# Altium PCB TPS5430-T.PcbDoc
Units mil, origin at the board's own origin, x right, y up, seen from the top; angles counter-clockwise.
Board outline 3105 x 2810 mil, 2 copper layers (Top Layer, Bottom Layer); 70 components, 24 nets, 173 pads, 80 vias.
Unrouted connection lines stored in the file: 44.
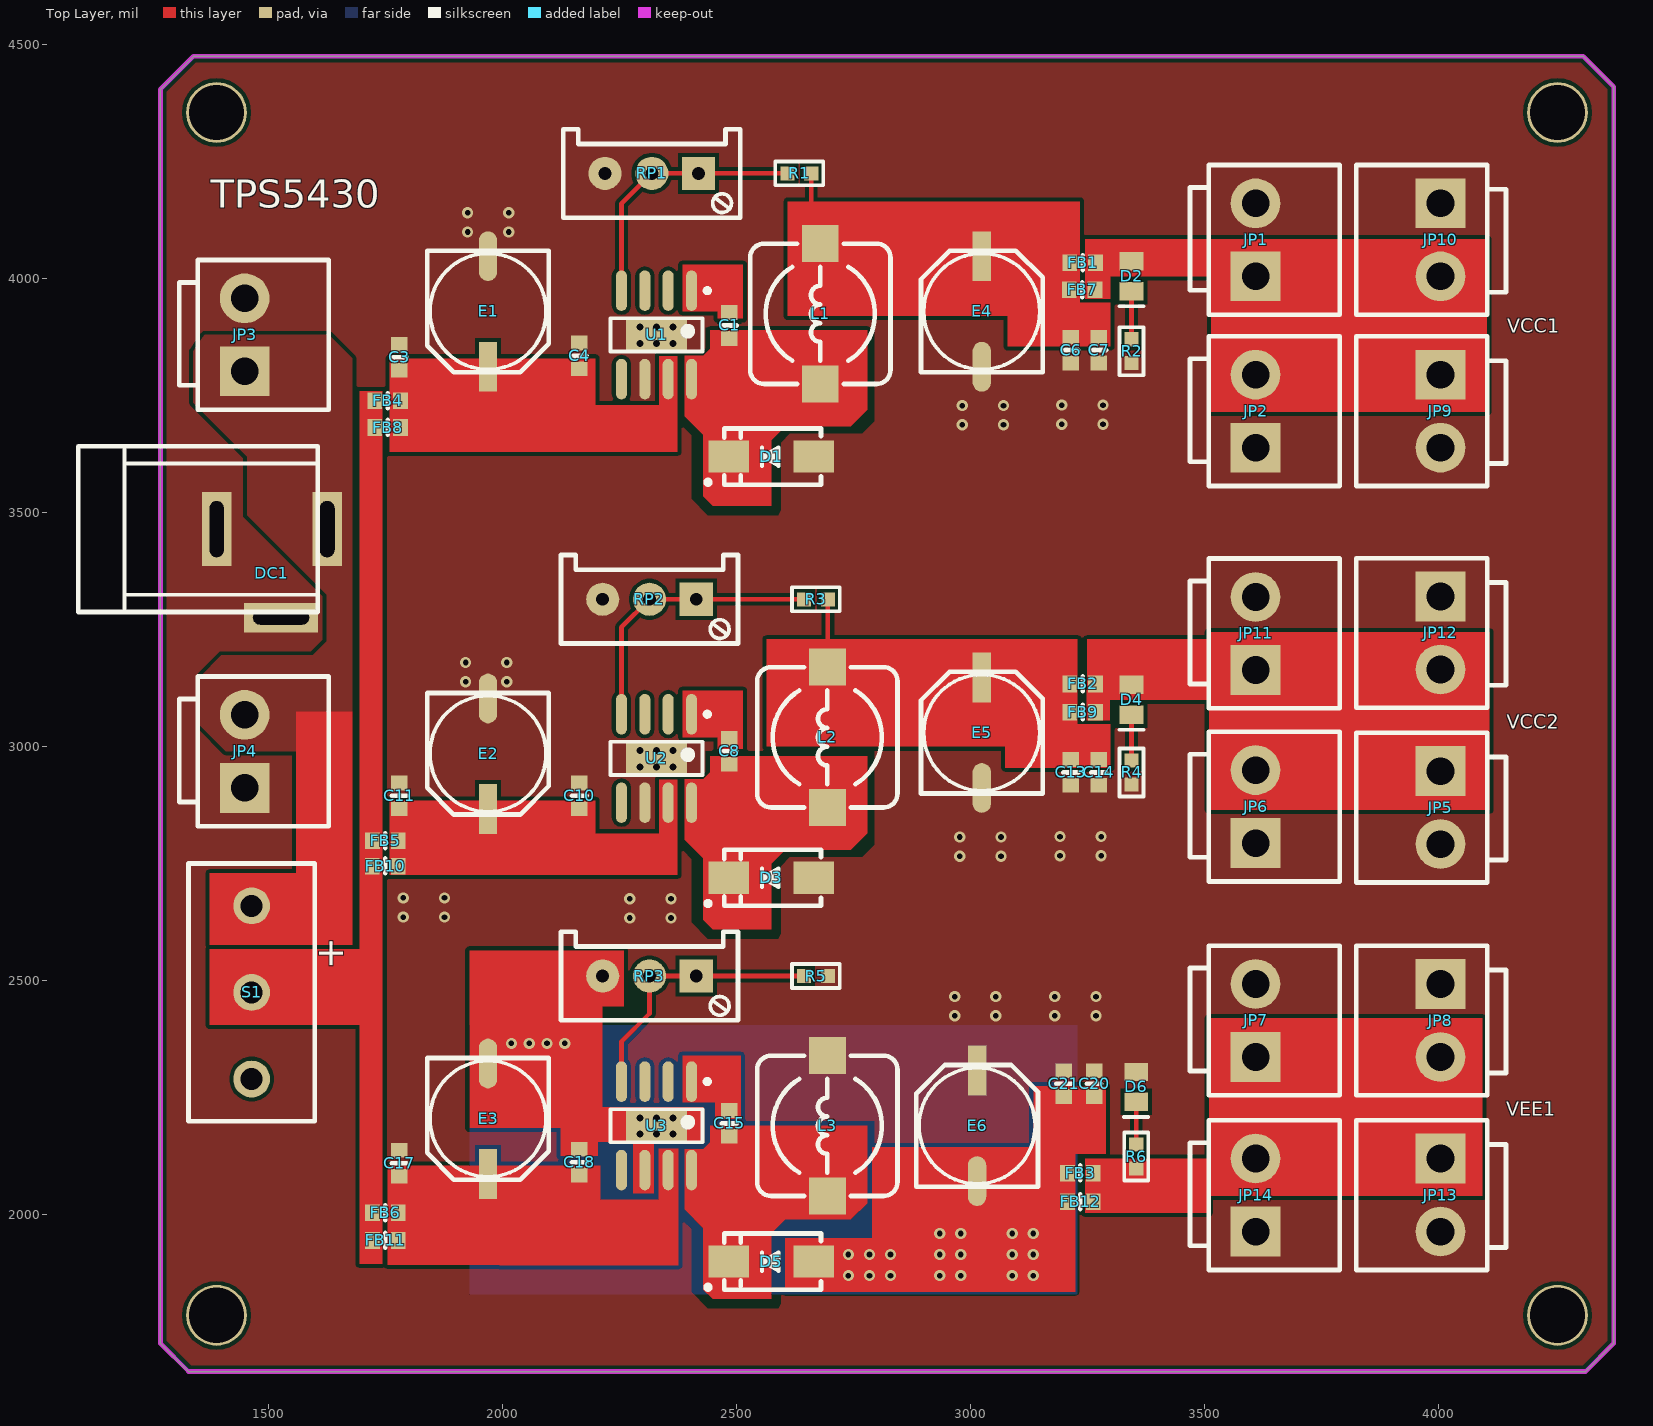
[diagram p0: Top Layer view]
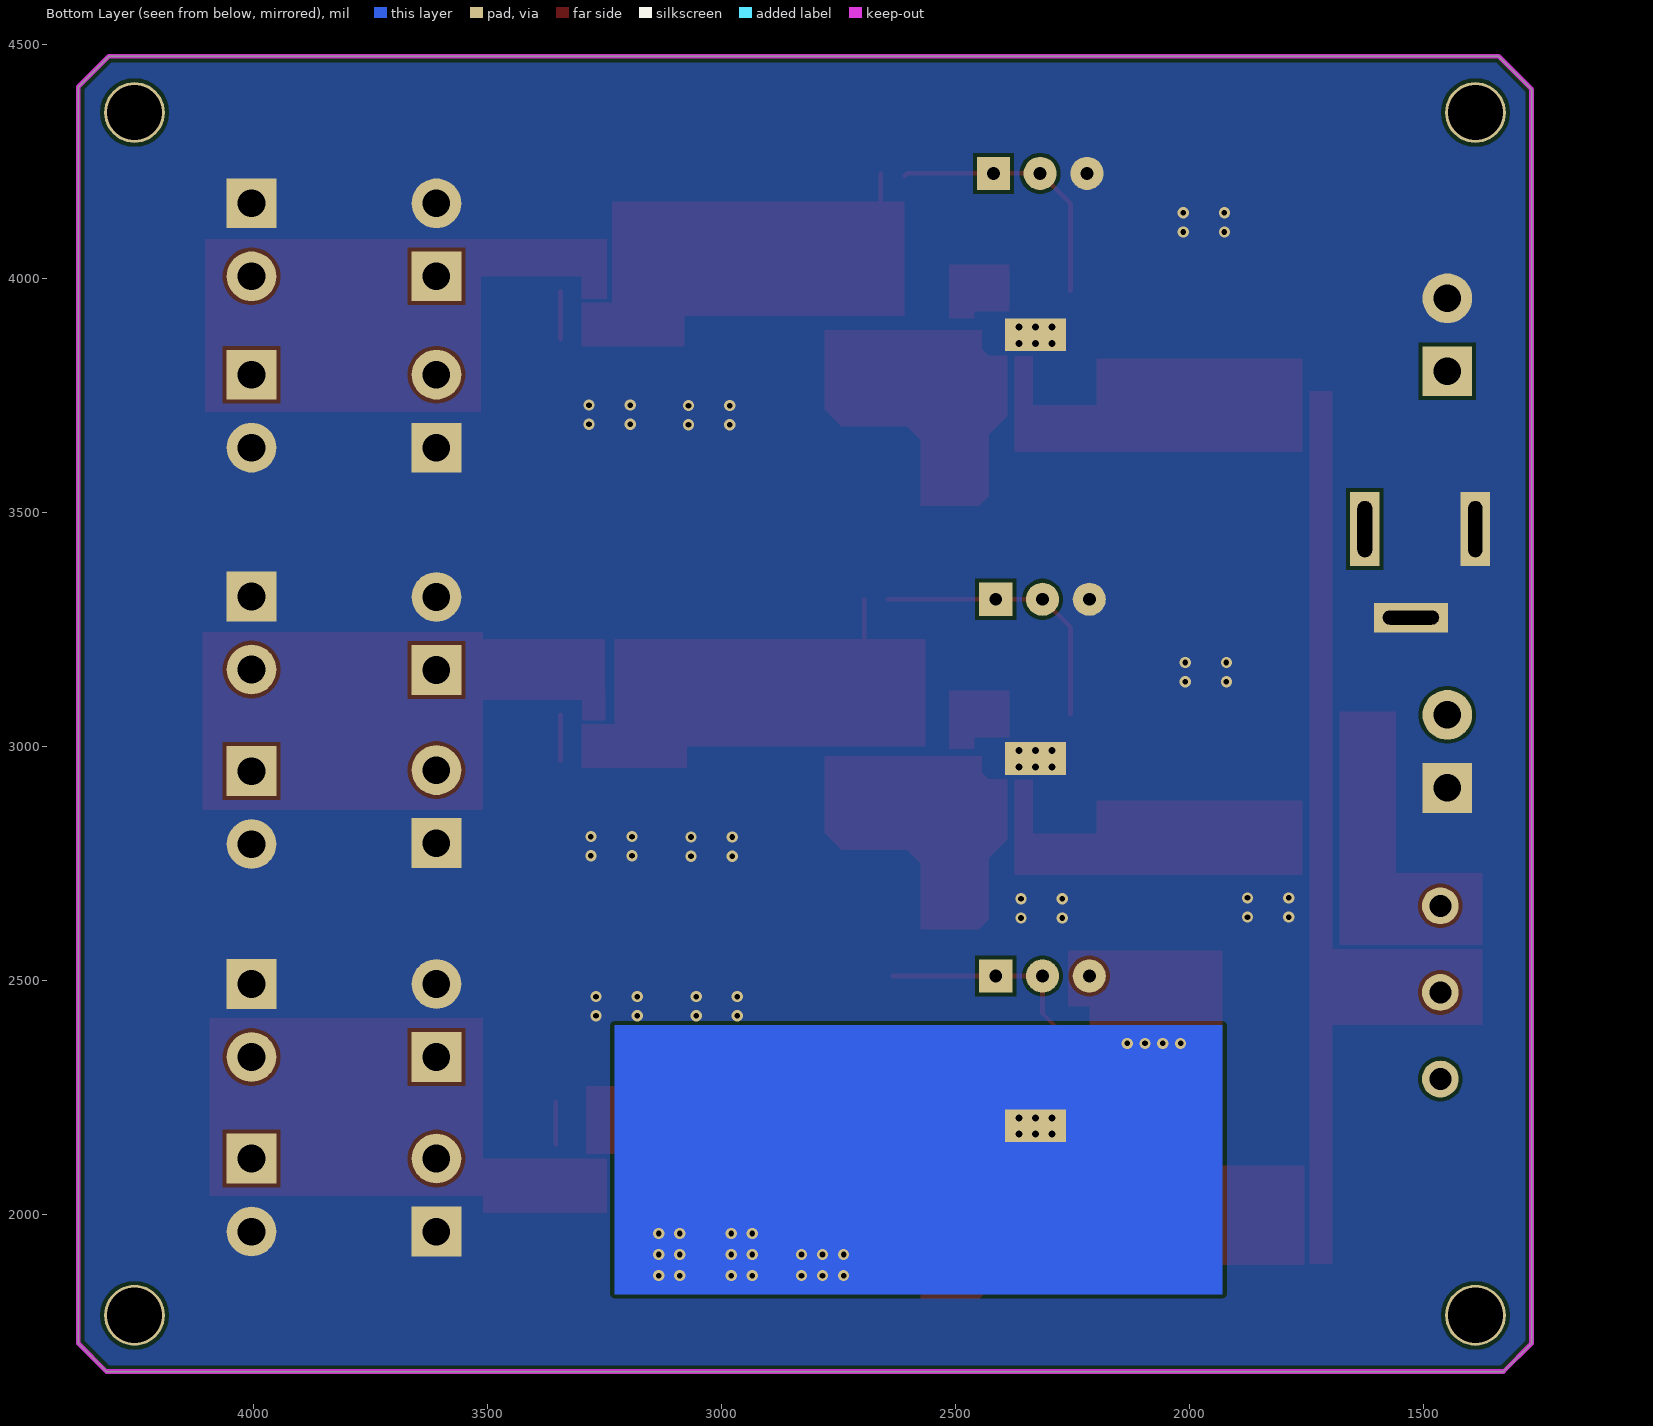
[diagram p1: Bottom Layer view, seen from below]
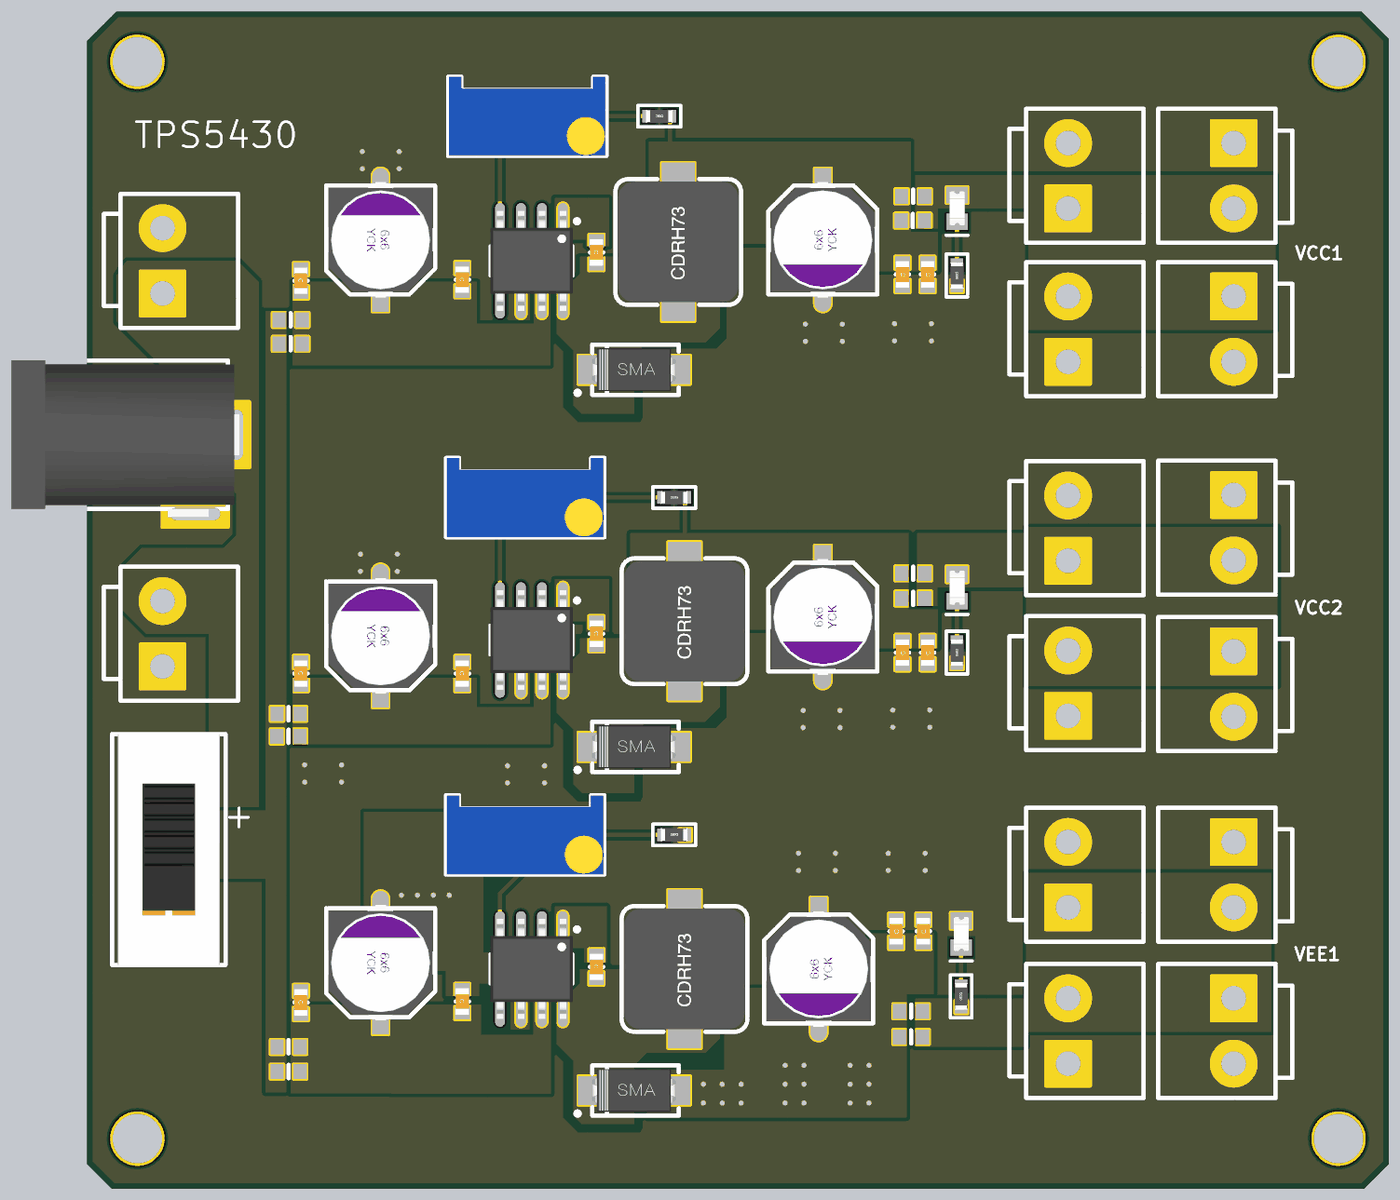
[diagram p2: 3D render of the assembled board from above, using the file's embedded part models]

## Layer stack, top to bottom
Top Solder: solder mask 0.4, Solder Resist, Dk 3.5
Top Layer: signal copper 1.4
Dielectric 1: dielectric 12.6, FR-4, Dk 4.8
Bottom Layer: signal copper 1.4
Bottom Solder: solder mask 0.4, Solder Resist, Dk 3.5

## Board outline
1330,1665 1270,1725 1270,4405 1340,4475 4310,4475 4375,4410 4375,1725 4315,1665

## Design rules (kind name [scope] priority, off if disabled: settings)
Clearance [All] p1: gap=8 ignorepadtopadclearanceinfootprint=FALSE except(0: Arc-Hole Track-Hole SMDPad-Hole THPad-Hole Via-Hole Fill-Hole Poly-Hole Region-Hole Text-Hole)
PolygonConnect [All] p1: connectstyle=Direct reliefconductorwidth=10 reliefentries=4 polygonreliefangle="90 Angle" airgapwidth=10
RoutingVias [All] p1: holewidth=12 width=24 viastyle="Through Hole" minholewidth=12 minwidth=24 maxholewidth=12 maxwidth=24
SolderMaskExpansion [All] p1: expansion=4 istentingtop=FALSE
Width [All] p1: maxlimit=45 minlimit=10 preferedwidth=10
30 further rules are at their usual default settings.

## Components (designator, comment, footprint, x,y, rotation, side; value= is the part's Value field where it differs from the comment)
C1 "Cap-S" C0603-L 2485,3900 r270 top value=100nF
C3 "Cap-S" C0603-L 1780,3832.44 r270 top value=100nF
C4 "Cap-S" C0603-L 2165,3835 r270 top value=10uF
C6 "Cap-S" C0603-L 3215,3847.56 r90 top value=100nF
C7 "Cap-S" C0603-L 3275,3847.56 r90 top value=10uF
C8 "Cap-S" C0603-L 2485,2990 r270 top value=100nF
C10 "Cap-S" C0603-L 2165,2895 r270 top value=100nF
C11 "Cap-S" C0603-L 1780,2895 r270 top value=10uF
C13 "Cap-S" C0603-L 3215,2945 r90 top value=100nF
C14 "Cap-S" C0603-L 3275,2945 r90 top value=10uF
C15 "Cap-S" C0603-L 2485,2195 r270 top value=100nF
C17 "Cap-S" C0603-L 1780,2110 r270 top value=100nF
C18 "Cap-S" C0603-L 2165,2112.44 r270 top value=10uF
C20 "Cap-S" C0603-L 3265,2280 r90 top value=100nF
C21 "Cap-S" C0603-L 3200,2280 r90 top value=10uF
D1 "SS36" SMA 2575,3620 r180 top
D2 "LED" Led-0805_L 3345,4005 r270 top
D3 "SS36" SMA 2575,2720 r180 top
D4 "LED" Led-0805_L 3345,3100 r270 top
D5 "SS36" SMA 2575,1900 r180 top
D6 "LED" Led-0805_L 3355,2273 r270 top
DC1 "DC" DCIN-L 1626.22,3465 r180 top
E1 "10uF/10V" "CT 6*6 - V" 1970,3930 r270 top
E2 "10uF/10V" "CT 6*6 - V" 1970,2985 r270 top
E3 "10uF/10V" "CT 6*6 - V" 1970,2205 r270 top
E4 "10uF/10V" "CT 6*6 - V" 3025,3930 r90 top
E5 "10uF/10V" "CT 6*6 - V" 3025,3030 r90 top
E6 "10uF/10V" "CT 6*6 - V" 3015,2190 r90 top
FB1 "600R" FB-0603 3240,4035 r0 top
FB2 "600R" FB-0603 3240,3135 r0 top
FB3 "600R" FB-0603 3235,2090 r0 top
FB4 "600R" FB-0603 1755,3740 r0 top
FB5 "600R" FB-0603 1750,2800 r0 top
FB6 "600R" FB-0603 1750,2005 r0 top
FB7 "600R" FB-0603 3239,3977 r0 top
FB8 "600R" FB-0603 1755,3683 r0 top
FB9 "600R" FB-0603 3240,3075 r0 top
FB10 "600R" FB-0603 1749.88,2746 r0 top
FB11 "600R" FB-0603 1750,1946 r0 top
FB12 "600R" FB-0603 3235,2028.57 r0 top
JP1 "HDR-1X2" VH3.96-LI-2P 3610,4082.95 r90 top
JP2 "HDR-1X2" VH3.96-LI-2P 3610,3716.95 r90 top
JP3 "HDR-1X2" VH3.96-LI-2P 1450,3880 r90 top
JP4 "HDR-1X2" VH3.96-LI-2P 1450,2990 r90 top
JP5 "HDR-1X2" VH3.96-LI-2P 4005,2870 r270 top
JP6 "HDR-1X2" VH3.96-LI-2P 3610,2871.95 r90 top
JP7 "HDR-1X2" VH3.96-LI-2P 3610,2415 r90 top
JP8 "HDR-1X2" VH3.96-LI-2P 4005,2415 r270 top
JP9 "HDR-1X2" VH3.96-LI-2P 4005,3717.05 r270 top
JP10 "HDR-1X2" VH3.96-LI-2P 4005,4083.05 r270 top
JP11 "HDR-1X2" VH3.96-LI-2P 3610,3241.95 r90 top
JP12 "HDR-1X2" VH3.96-LI-2P 4005,3243.05 r270 top
JP13 "HDR-1X2" VH3.96-LI-2P 4005,2042.05 r270 top
JP14 "HDR-1X2" VH3.96-LI-2P 3610,2041.95 r90 top
L1 "22uH" CDRH73 2680,3925 r90 top
L2 "22uH" CDRH73 2695,3020 r90 top
L3 "22uH" CDRH73 2695,2190 r90 top
R1 "10K" "R 0603_L" 2635,4225 r0 top
R2 "10K" "R 0603_L" 3345,3845 r90 top
R3 "10K" "R 0603_L" 2670.59,3315 r0 top
R4 "10K" "R 0603_L" 3345,2945 r90 top
R5 "10K" "R 0603_L" 2670.59,2510 r0 top
R6 "10K" "R 0603_L" 3355,2124.41 r90 top
RP1 "10K" 3296W 2320,4225 r180 top
RP2 "10K" 3296W 2315,3315 r180 top
RP3 "10K" 3296W 2315,2510 r180 top
S1 "SS-12F23" SS-12D10 1465,2475 r270 top
U1 "TPS5430" "SOP-8 with pad" 2330,3880 r270 top
U2 "TPS5430" "SOP-8 with pad" 2330,2975 r270 top
U3 "TPS5430" "SOP-8 with pad" 2330,2190 r270 top

## Footprints (in the part's own frame and the unit in brackets; to place one, negate y for a bottom-side part, rotate by r counter-clockwise, add the part's x,y. Pads: shape width x height; smd on the part's side, far side on the other; paste and mask are expansions set on the pad)
3296W [mm] "Precise Multi-Winding Adjustable Resistor"
  rect 1.8x1.8 hole 0.7: 1(-2.54,0)
  round 1.8 hole 0.7: 2(0,0) 3(2.54,0)
  silkscreen extent -4.8,-2.4 4.8,2.4, body extent -4.75,-2.4 4.75,2.4, height 11.52
C0603-L [mm] "贴片电容0603 高密度"
  rect 0.8x0.9 smd: 1(-0.7,0) 2(0.7,0)
  silkscreen extent 0,-0.39 0,0.41, body extent -0.8,-0.4 0.8,0.41, height 0.88
CDRH73 [mm] "7.3*7.3*3.4mm（长宽高）"
  rect 2x2 smd: 1(-3.81,0) 2(3.81,0)
  silkscreen extent -3.81,-3.81 3.81,3.81, body extent -3.65,-3.65 3.65,3.65, height 3.65
"CT 6*6 - V" [mm] "直径6mm，高6mm"
  rect 2.7x1 smd: 1(3,0)
  oval 2.7x1 smd: 2(-3,0)
  silkscreen extent -3.3,-3.3 3.3,3.3, body extent -3.5,-3.15 3.5,3.15, height 6
DCIN-L [mm] "DC插座  小焊盘"
  rect 1.6x4 hole 0.8 slot 3.048 at 90 deg: 1(0,0)
  rect 1.6x4 hole 0.762 slot 3.048 at 90 deg: 2(6,0)
  rect 4x1.6 hole 0.762 slot 3.048 at 0 deg: 3(2.5,4.8)
  silkscreen extent 0.52,-4.5 13.5,4.5, body extent -0.2,-4.5 13.62,5, height 11.2
FB-0603 [mm]
  rect 0.8x0.9 smd: 1(-0.686,-0.025) 2(0.714,-0.025)
  silkscreen extent 0.01,-0.42 0.01,0.38, body extent -0.8,-0.44 0.83,0.39, height 0.71
Led-0805_L [mm] "贴片LED0805-高密度"
  rect 1x1.3 smd: 1(-0.813,0) 2(0.813,0)
  silkscreen extent 1.63,-0.66 1.63,0.66, body extent -1.03,-0.44 1.03,0.47, height 0.85
"R 0603_L" [mil] "1/10W贴片电阻"
  rect 30x30 smd: 1(-25.59,0) 2(25.59,0)
  silkscreen extent -51,-26 51,26, body extent -31,-16 32,16, height 16
SMA [mm] "4.5x2.6*2.2mm（长宽高，不包括引脚）"
  rect 2.2x1.75 smd: 1(-2.3,0) 2(2.3,0)
  silkscreen extent -2.7,-1.52 3.56,1.52, body extent -2.53,-1.3 2.58,1.3, height 2.15
"SOP-8 with pad" [mm]
  oval 2.2x0.6 smd: 1(-2.4,1.905) 2(-2.4,0.635) 3(-2.4,-0.635) 4(-2.4,-1.905) 5(2.4,-1.905) 6(2.4,-0.635) 7(2.4,0.635) 8(2.4,1.905)
  rect 1.778x3.3 smd: 9(0,0)
  rect 1.778x3.3 smd far side: 9(0,0)
  silkscreen extent -2.52,-2.5 0.9,2.88, body extent -3.03,-2.5 3.03,2.5, height 1.9
SS-12D10 [mm] "脚距3mm"
  round 2 hole 1.2: 1(-4.7,0) 2(0,0) 3(4.7,0)
  silkscreen extent -7,-3.43 7,3.43, body extent -7,-3.1 7,3.1, height 9.65
VH3.96-LI-2P [mm] "接插件，25V/5A"
  rect 2.7x2.7 hole 1.5: 1(-1.98,0)
  round 2.7 hole 1.5: 2(1.982,0)
  silkscreen extent -4.06,-4.57 4.07,3.56, body extent -3.98,-4.4 4.03,4.16, height 10.5

## Part data
C1 C3 C4 C6 C7 C8 C10 C11 C13 C14 C15 C17 C18 C20 C21: "贴片瓷片电容"
D1 D3 D5: library part M7, "整流二极管", BOM名称=整流二极管, 学习资源=www.ooocke.com, 版权归属=源创客
D2 D4 D6: "发光二极管"
DC1: "DC插座"
E1 E2 E3 E4 E5 E6: library part C-CT, "贴片固态电容", BOM名称=贴片固态电容, 学习资源=www.ooocke.com, 版权归属=源创客
FB1 FB2 FB3 FB4 FB5 FB6 FB7 FB8 FB9 FB10 FB11 FB12: library part FB
JP1 JP2 JP3 JP4 JP5 JP6 JP7 JP8 JP9 JP10 JP11 JP12 JP13 JP14: library part "Header 2_1", "2P接插件", BOM名称=2P接插件, 学习资源=www.ooocke.com, 版权归属=源创客
L1 L2 L3: library part L-CDRH, "功率屏蔽电感", BOM名称=功率屏蔽电感, 学习资源=www.ooocke.com, 版权归属=源创客
R1 R2 R3 R4 R5 R6: library part R, "贴片电阻", BOM名称=贴片电阻, 学习资源=www.ooocke.com, 版权归属=源创客
RP1 RP2 RP3: library part RP-ID, "插件单联电位器", BOM名称=插件电位器, 学习资源=www.ooocke.com, 版权归属=源创客
S1: library part SSW-1P, "1路波动开关", BOM名称=波动开关, 学习资源=www.ooocke.com, 版权归属=源创客

## Free pads (board coordinates)
  round 129.92 hole 118.11: 3(1390,1785) 3(1390,4355) 3(4255,4355) 3(4255,1785)

## Via types
v1: diameter 24, hole 12, Top Layer to Bottom Layer, tented both sides, 62 vias
v2: diameter 25, hole 15, Top Layer to Bottom Layer, 18 vias

## Nets (pads, with @x,y where several pads share a name; then routed paths per layer and width w, separated by ;. In a path a pad name is that pad's centre, name@x,y a point inside that pad or via, vN(x,y) a via of type N, cw(c..) or ccw(c..) an arc to the next point about the centre after c; other vN are vias at no path point)
GND: C3.1 C4.1 C6.1 C7.1 C10.1 C11.1 C13.1 C14.1 C17.1 C20.2 C21.2 D1.1 D3.1 D6.1 DC1.2 DC1.3 E1.2 E2.2 E4.2 E5.2 E6.1 JP1.2 JP2.1 JP3.2 JP4.1 JP5.2 JP6.1 JP7.2 JP8.1 JP9.2 JP10.1 JP11.2 JP12.1 JP13.2 JP14.1 L3.2 R2.1 R4.1 R5.2 RP1.3 RP2.3 U1.6 U1.9 U2.6 U2.9
  other v1: 2967,2425 3055,2425 3181,2425 3269,2425 2967,2466 3055,2466 3181,2466 3269,2466 2273,2634 2361,2634 1789,2636 1877,2636 2273,2675 2361,2675 1789,2677 1877,2677 2978,2766 3066,2766 3192,2767 3280,2767 2978,2807 3066,2807 3192,2808 3280,2808 1922,3139 2010,3139 1922,3180 2010,3180 2983.41,3687.78 3071.41,3687.78 3196,3689 3284,3689 2983.41,3728.78 3071.41,3728.78 3196,3730 3284,3730 1926.41,4099.78 2014.41,4099.78 1926.41,4140.78 2014.41,4140.78
  other v2: 2295,2957 2330,2957 2365,2957 2295,2992 2330,2992 2365,2992 2295,3862 2330,3862 2365,3862 2295,3897 2330,3897 2365,3897
NetC1_1: C1.1 U1.1
NetC1_2: C1.2 D1.2 L1.1 U1.8
NetC6_2: C6.2 C7.2 E4.1 FB1.1 FB7.1 L1.2 R1.2 | length 98.9
  Top Layer w10: R1.2 2660.59,4139.41 2670,4130
NetC8_1: C8.1 U2.1 | length 8.9
  Top Layer w10: U2.1@2405,3073.71 U2.1@2411.29,3080
NetC8_2: C8.2 D3.2 L2.1 U2.8
NetC13_2: C13.2 C14.2 E5.1 FB2.1 FB9.1 L2.2 R3.2 | length 145.5
  Top Layer w10: L2.2 2696.18,3171.18 R3.2
NetC15_1: C15.1 U3.1
NetC15_2: C15.2 D5.2 L3.1 U3.8
NetD2_2: D2.2 R2.2 | length 102.4
  Top Layer w10: R2.2 D2.2
NetD4_2: D4.2 R4.2 | length 97.4
  Top Layer w10: R4.2 D4.2
NetD6_2: D6.2 R6.2 | length 91
  Top Layer w10: R6.2 D6.2
NetR1_1: R1.1 RP1.1 RP1.2 U1.4 | length 568.9
  Top Layer w10: U1.4 2255,4160 RP1.2 RP1.1 2604.4,4225 R1.1@2609.41,4220
NetR3_1: R3.1 RP2.1 RP2.2 U2.4 | length 600.4
  Top Layer w10: U2.4 2255,3255 RP2.2 RP2.1 R3.1
NetR5_1: R5.1 RP3.1 RP3.2 U3.4 | length 569.8
  Top Layer w10: U3.4 2255,2370 2315,2430 RP3.2 RP3.1 R5.1@2634.4,2510
VCCIN00: DC1.1 JP3.1 JP4.2 S1.1
VCCIN0: FB4.1 FB5.1 FB6.1 FB8.1 FB10.1 FB11.1 S1.2
VCCIN1: C3.2 C4.2 E1.1 FB4.2 FB8.2 U1.7
VCCIN2: C10.2 C11.2 E2.1 FB5.2 FB10.2 U2.7
VCCIN3: C17.2 C18.2 E3.1 FB6.2 FB11.2 U3.7 | length 7.1
  Top Layer w10: E3.1@1983.18,2040.55 E3.1@1988.18,2035.55
VCCOUT1: D2.1 FB1.2 FB7.2 JP1.1 JP2.2 JP9.1 JP10.2
VCCOUT2: D4.1 FB2.2 FB9.2 JP5.1 JP6.2 JP11.1 JP12.2
VEEBUF: C18.1 C20.1 C21.1 D5.1 E3.2 E6.2 FB3.1 FB12.1 RP3.3 U3.6 U3.9
  other v1: 2740,1870 2785,1870 2830,1870 2935,1870 2980,1870 3090,1870 3135,1870 2740,1915 2785,1915 2830,1915 2935,1915 2980,1915 3090,1915 3135,1915 2935,1960 2980,1960 3090,1960 3135,1960 2020,2366 2058,2366 2096,2366 2134,2366
  other v2: 2295,2172 2330,2172 2365,2172 2295,2207 2330,2207 2365,2207
VEEOUT: FB3.2 FB12.2 JP7.1 JP8.2 JP13.1 JP14.2 R6.1
pads on no net: S1.3 U1.2 U1.3 U1.5 U2.2 U2.3 U2.5 U3.2 U3.3 U3.5

## Polygon pours and split planes (outlines as drawn)
GND on Top Layer "GND_L01_P005" (solid, remove dead copper, pour order 5): 1340,4475 1265,4400 1265,1730 1330,1665 4315,1665 4320,1660 4370,1710 4370,4410 4310,4470 4310,4475
VCCIN00 on Top Layer "VCCIN00_L01_P000" (solid, remove dead copper, pour order 0): 1340,3845 1360,3875 1365,3880 1630,3880 1680,3830 1680,3065 1605,2990 1410,2990 1355,3045 1355,3150 1400,3195 1595,3195 1625,3225 1625,3325 1455,3495 1455,3620 1340,3735
GND on Bottom Layer "GND_L02_P008" (solid, remove dead copper, pour order 8): 1344,4476 1344,4472 1265,4393 1265,1722 1272,1722 1333,1661 1337,1665 4320,1665 4376,1721 4376,4408 4308,4476

## Keep-outs
Keep-Out Layer:
  the board outline again, w10

## Other copper
Top Layer:
  rectangle net VCCOUT1: 3245,3957 3300,4018
  rectangle net VCCOUT2: 3249,3056 3299,3121
  rectangle net NetC13_2: 3075,2955 3300,3048
  rectangle net VEEOUT: 3245,2004 3510,2079
  rectangle net VCCIN3: 1995,1892 2377,2033
  rectangle net VCCIN3: 2334,1911 2377,2141
  rectangle net VCCIN1: 2140,3630 2375,3730
  rectangle net VCCIN1: 2335,3630 2375,3835
  rectangle net VCCIN1: 1760,3630 2200,3830
  rectangle net VCCOUT1: 3515,3715 4105,4085
  rectangle net VCCOUT1: 3245,4005 4100,4085
  rectangle net NetC6_2: 3080,3855 3300,3949
  rectangle net NetC6_2: 2610,3920 3235,4165
  rectangle net NetC1_1: 2460,3915 2515,3960
  rectangle net NetC1_1: 2385,3930 2515,4030
  rectangle net NetC8_1: 2460,2995 2515,3035
  rectangle net NetC8_1: 2385,3020 2515,3120
  rectangle net VCCOUT2: 3510,2865 4110,3245
  rectangle net VCCOUT2: 3250,3100 4110,3230
  rectangle net NetC13_2: 2565,3000 3230,3230
  rectangle net VCCIN2: 2335,2760 2375,2930
  rectangle net VCCIN2: 2125,2726 2375,2815
  rectangle net VCCIN2: 1760,2726 2200,2885
  rectangle net VEEOUT: 3510,2040 4095,2420
  rectangle net VEEBUF: 2790,1835 3225,2030
  rectangle net VEEBUF: 2605,1835 2965,1950
  rectangle net VEEOUT: 3245,2050 4090,2120
  rectangle net VEEBUF: 3135,2130 3290,2275
  rectangle net VEEBUF: 2790,2015 3225,2145
  rectangle net NetC15_1: 2455,2205 2510,2265
  rectangle net NetC15_1: 2385,2240 2510,2340
  rectangle net VEEBUF: 2280,2045 2325,2175
  rectangle net VEEBUF: 2130,2445 2260,2565
  rectangle net VEEBUF: 2160,2155 2430,2230
  rectangle net VEEBUF: 1930,2185 2215,2565
  rectangle net VEEBUF: 2125,2125 2205,2225
  rectangle net VCCIN3: 1755,1893 2210,2105
  rectangle net VCCIN3: 1755,1975 1810,2105
  rectangle net VCCIN0: 1375,2405 1740,2568
  rectangle net VCCIN00: 1560,2585 1680,3075
  rectangle net VCCIN00: 1375,2576 1680,2730
  rectangle net VCCIN0: 1695,1895 1745,3760
  pour cut-out: 2390,3840 2375,3825 2375,3695 2405,3665 2405,3530 2440,3495 2590,3495 2595,3505 2595,3510 2595,3650 2615,3670 2770,3670 2795,3695 2795,3895 2435,3895 2435,3850 2425,3840
  region net NetC1_2: 2390,3835 2390,3706.48 2430,3666.48 2430,3535 2450,3515 2575,3515 2575,3655 2605,3685 2745,3685 2780,3720 2780,3890 2445,3890 2445,3850 2430,3835
  pour cut-out: 2390,2145 2380,2135 2380,1995 2405,1970 2405,1835 2440,1800 2590,1800 2595,1810 2595,1815 2595,1955 2615,1975 2770,1975 2795,2000 2795,2200 2440,2200 2440,2160 2425,2145
  region net NetC15_2: 2390,2140 2390,2011.48 2430,1971.48 2430,1840 2450,1820 2575,1820 2575,1960 2605,1990 2745,1990 2780,2025 2780,2190 2445,2190 2445,2155 2430,2140
  region net NetC8_2: 2390,2930 2390,2801.48 2430,2761.48 2430,2630 2450,2610 2575,2610 2575,2750 2605,2780 2745,2780 2780,2815 2780,2980 2445,2980 2445,2945 2430,2930
  pour cut-out: 2390,2935 2375,2920 2375,2790 2405,2760 2405,2625 2440,2590 2590,2590 2595,2600 2595,2605 2595,2745 2615,2765 2770,2765 2795,2790 2795,2990 2435,2990 2435,2945 2425,2935
Bottom Layer:
  rectangle net VEEBUF: 1930,1830 3230,2405

## Silkscreen, mask and mechanical layers (free items; w line width, h text height)
Top Overlay:
  text "TPS5430" at 1378,4152 h60
  text "VCC1" at 4148,3884 h30
  text "VCC2" at 4147,3038 h30
  text "+" at 1609,2593 h60 r270
  text "VEE1" at 4146,2211 h30
Bottom Solder:
  rectangle: 2130,3719 2534,4042
  rectangle: 2130,2814 2534,3137
  rectangle: 2130,2029 2534,2352
Mechanical 1:
  the board outline again, w10